# EAGLE board 12v_power_supply_v10 (EAGLE 9.7.0)
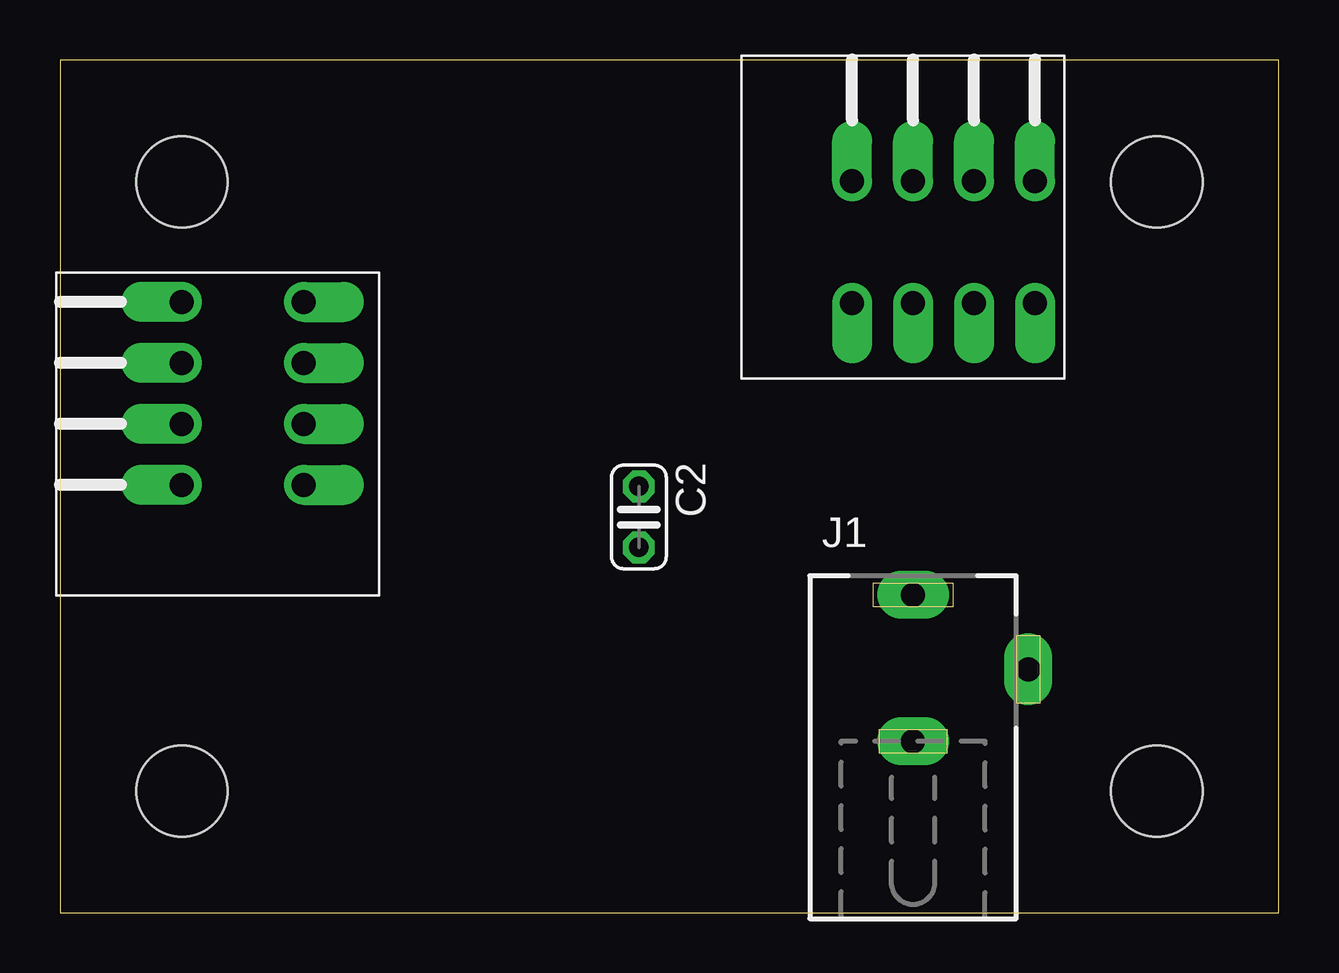
[diagram p0: board, top side]
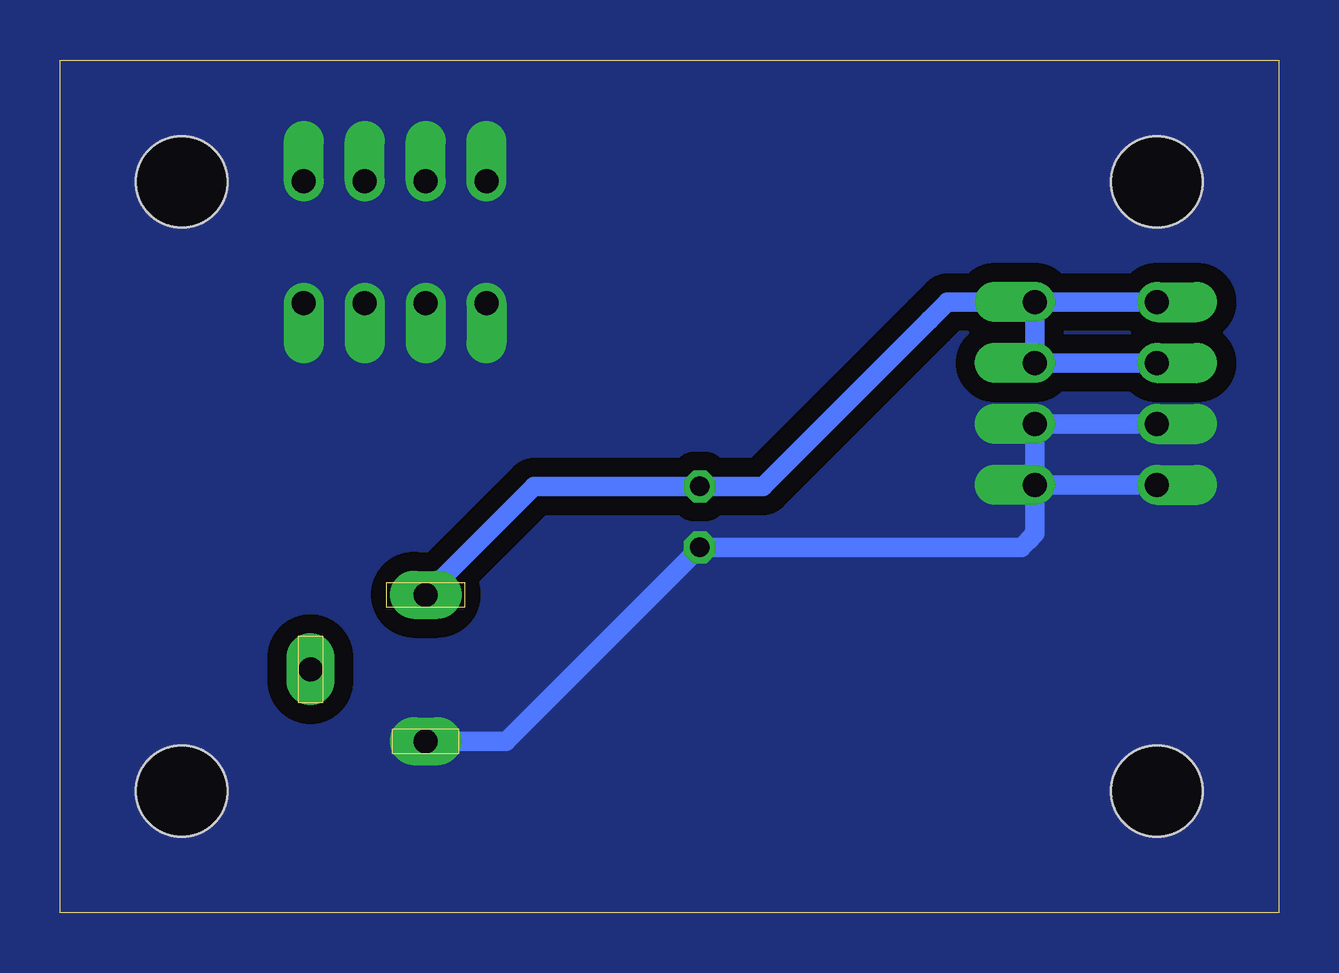
[diagram p1: board, bottom side, seen from below]

Size 50.8 x 35.56 mm. Coordinates in mm from the lower left corner, seen from the top.
Outline: 0,0 50.8,0 50.8,35.56 0,35.56 0,0
Copper layers (1*16): Top 0.035mm / dielectric 1.5mm / Bottom 0.035mm
Design rules "OthermillDRC_1_32_v2 *": minimum track width 32mil, minimum drill 32mil, track to track 0.794003125mm, track to pad 0.794003125mm, pad to pad 0.794003125mm, via to via 0.794003125mm, smd to smd 0mil, copper to edge 0mil, drill to drill 1mil, minimum pad ring 10mil, minimum via ring 10mil, stop-mask expansion 1mil, vias tented up to drill 30mil, thermal gap 10mil
Holes 3.81 mm at 45.72,5.08 5.08,5.08 5.08,30.48 45.72,30.48

## Footprints (pad centres in the part's own frame; a part is rotated, then mirrored left to right if it is on the bottom)
C025-024X044 = drill 0.813 octagon: 1 -1.27,0; 2 1.27,0
DCJ0202 = drill 1 pad 2 long: 1 0,3.1; 2 4.8,0; 3 0,-3
1-2834016-4 = drill 1 pad 1.676 offset: P$1 0,0; P$2 -5.08,0; P$3 0,-2.54; P$4 -5.08,-2.54; P$5 0,-5.08; P$6 -5.08,-5.08; P$7 0,-7.62; P$8 -5.08,-7.62

## Placement (x,y rotation side)
C2  ~0.33u  [C025-024X044]  24.13,16.51 270 top
J1  DCJ0202  [DCJ0202]  35.56,10.16 0 top
U$1  TE_CONN_1-2834016-4  [1-2834016-4]  10.16,25.47 0 top
U$2  TE_CONN_1-2834016-4  [1-2834016-4]  40.64,25.43 270 top

## Library data of the parts
C2 = rcl; SPICEPREFIX: C
J1 = con-jack; OC_FARNELL: unknown; OC_NEWARK: unknown
U$1 U$2 = 1-2834016-4

## Nets
+V: C2.1 J1.1 U$1.P$1 U$1.P$2 U$1.P$3 U$1.P$4
GND: C2.2 J1.3 U$1.P$5 U$1.P$6 U$1.P$7 U$1.P$8 U$2.P$1 U$2.P$2 U$2.P$3 U$2.P$4 U$2.P$5 U$2.P$6 U$2.P$7 U$2.P$8

## Tracks (layer width: path | path; a pad name or v marks a point on that pad's centre or on a via)
+V
  Bottom 0.813: J1.1 31.04,17.78 C2.1 21.5,17.78 14.56,24.72 13.8,25.47 U$1.P$1 | U$1.P$1 U$1.P$2 | U$1.P$1 U$1.P$3 U$1.P$4
GND
  Bottom 0.813: J1.3 32.21,7.16 C2.2 10.73,15.24 10.45,15.53 | 10.45,15.53 10.16,15.81 | 10.45,15.53 10.16,15.81 | 10.16,15.81 U$1.P$7 | U$1.P$7 U$1.P$5 U$1.P$6 | U$1.P$8 U$1.P$7
  pour Bottom (no thermals): -2.46,-2.46 53.26,-2.46 53.26,38.02 -2.46,38.02